# EAGLE board SparkFun_OpenScale_Panel_v10 (EAGLE 7.5.0), part 1 of 6
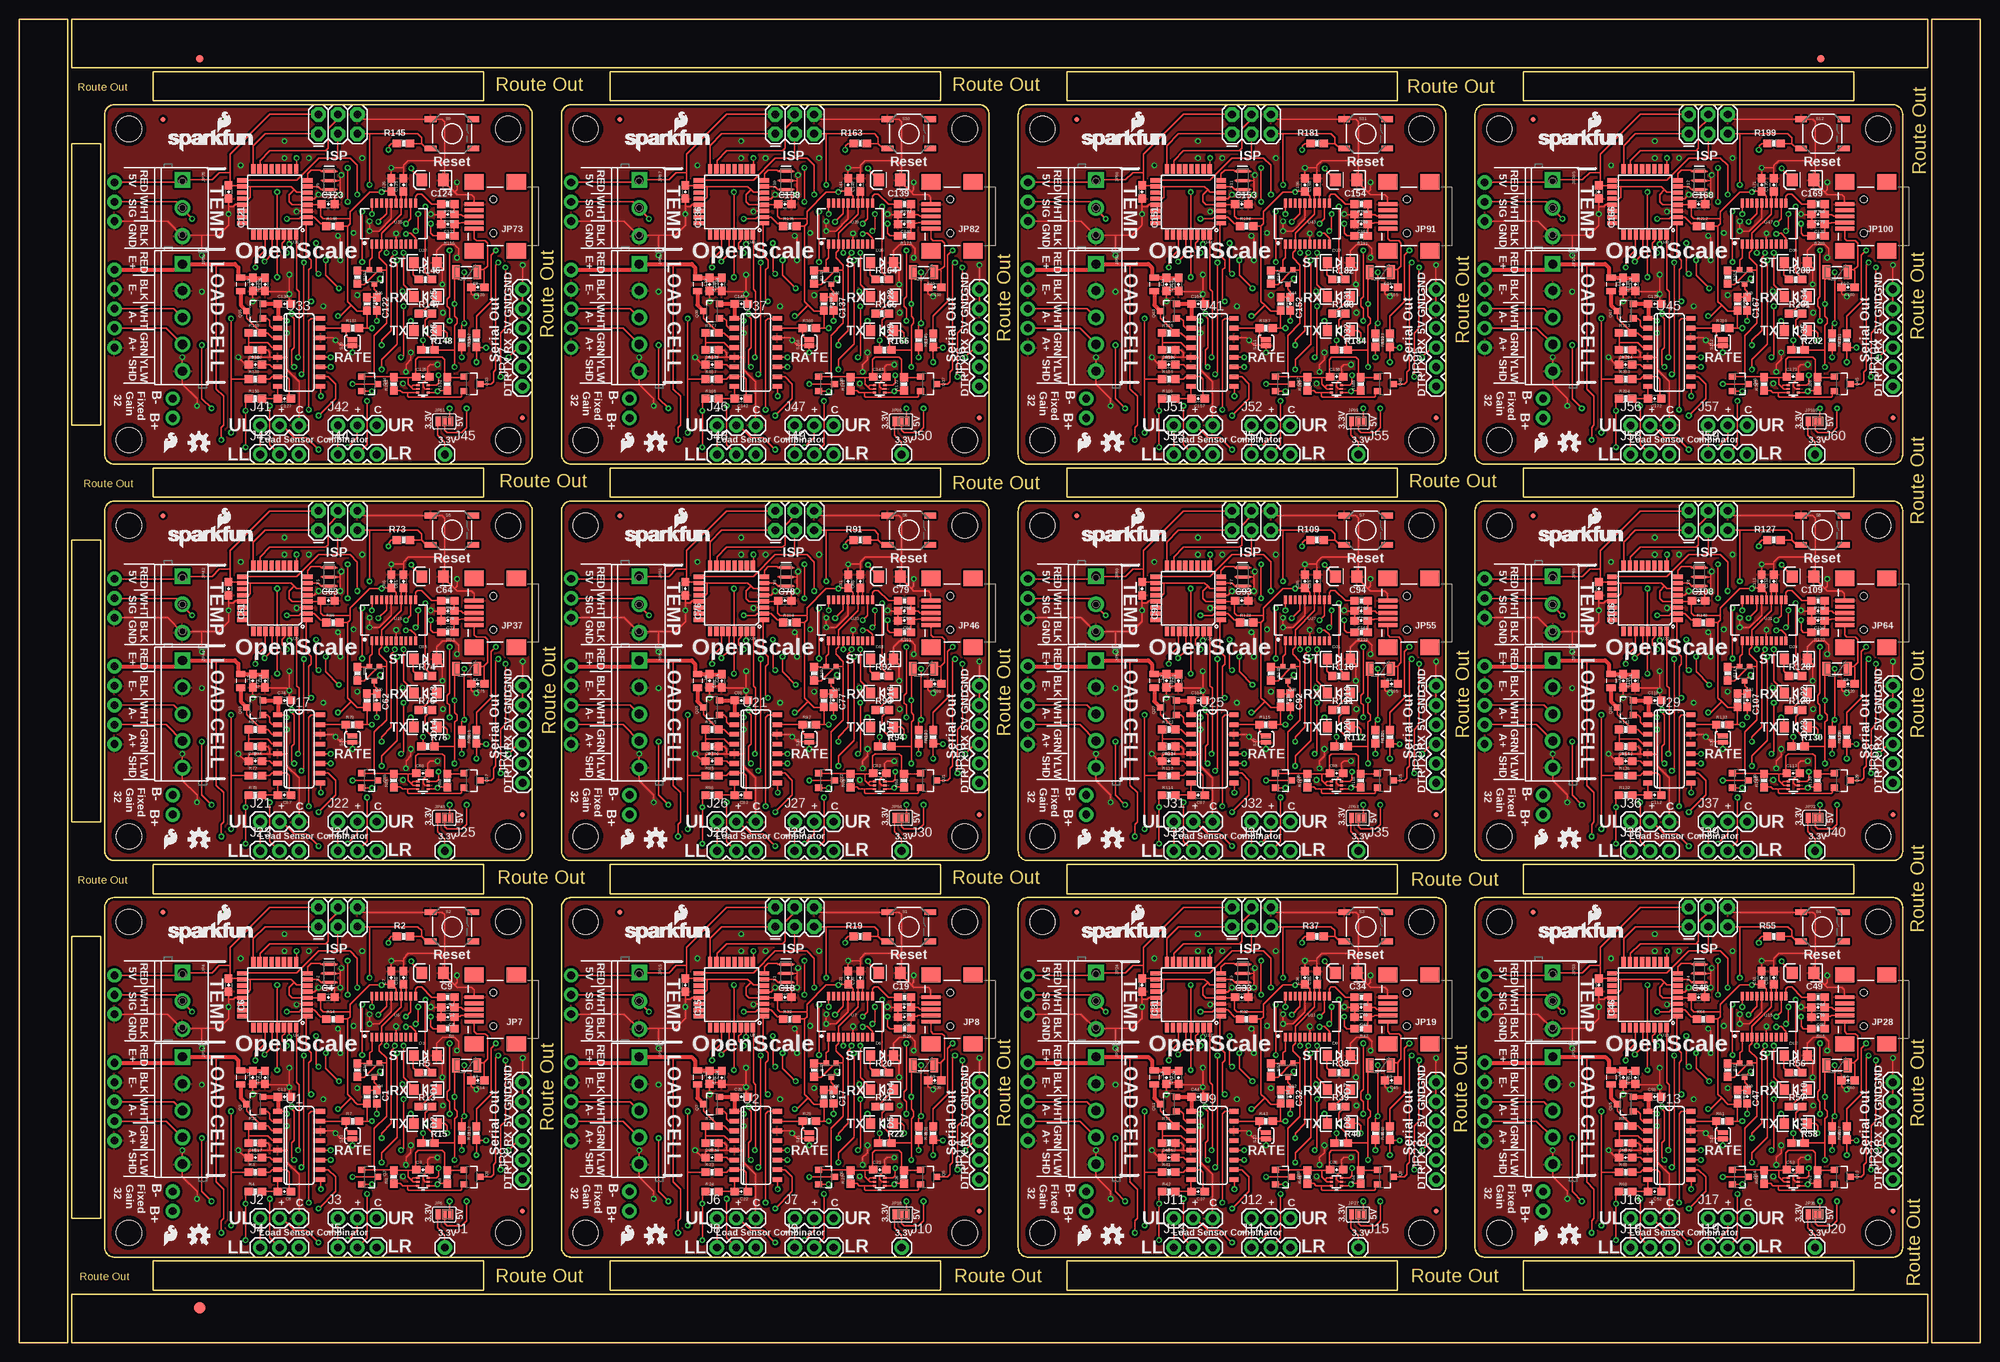
[diagram p0: board, top side]
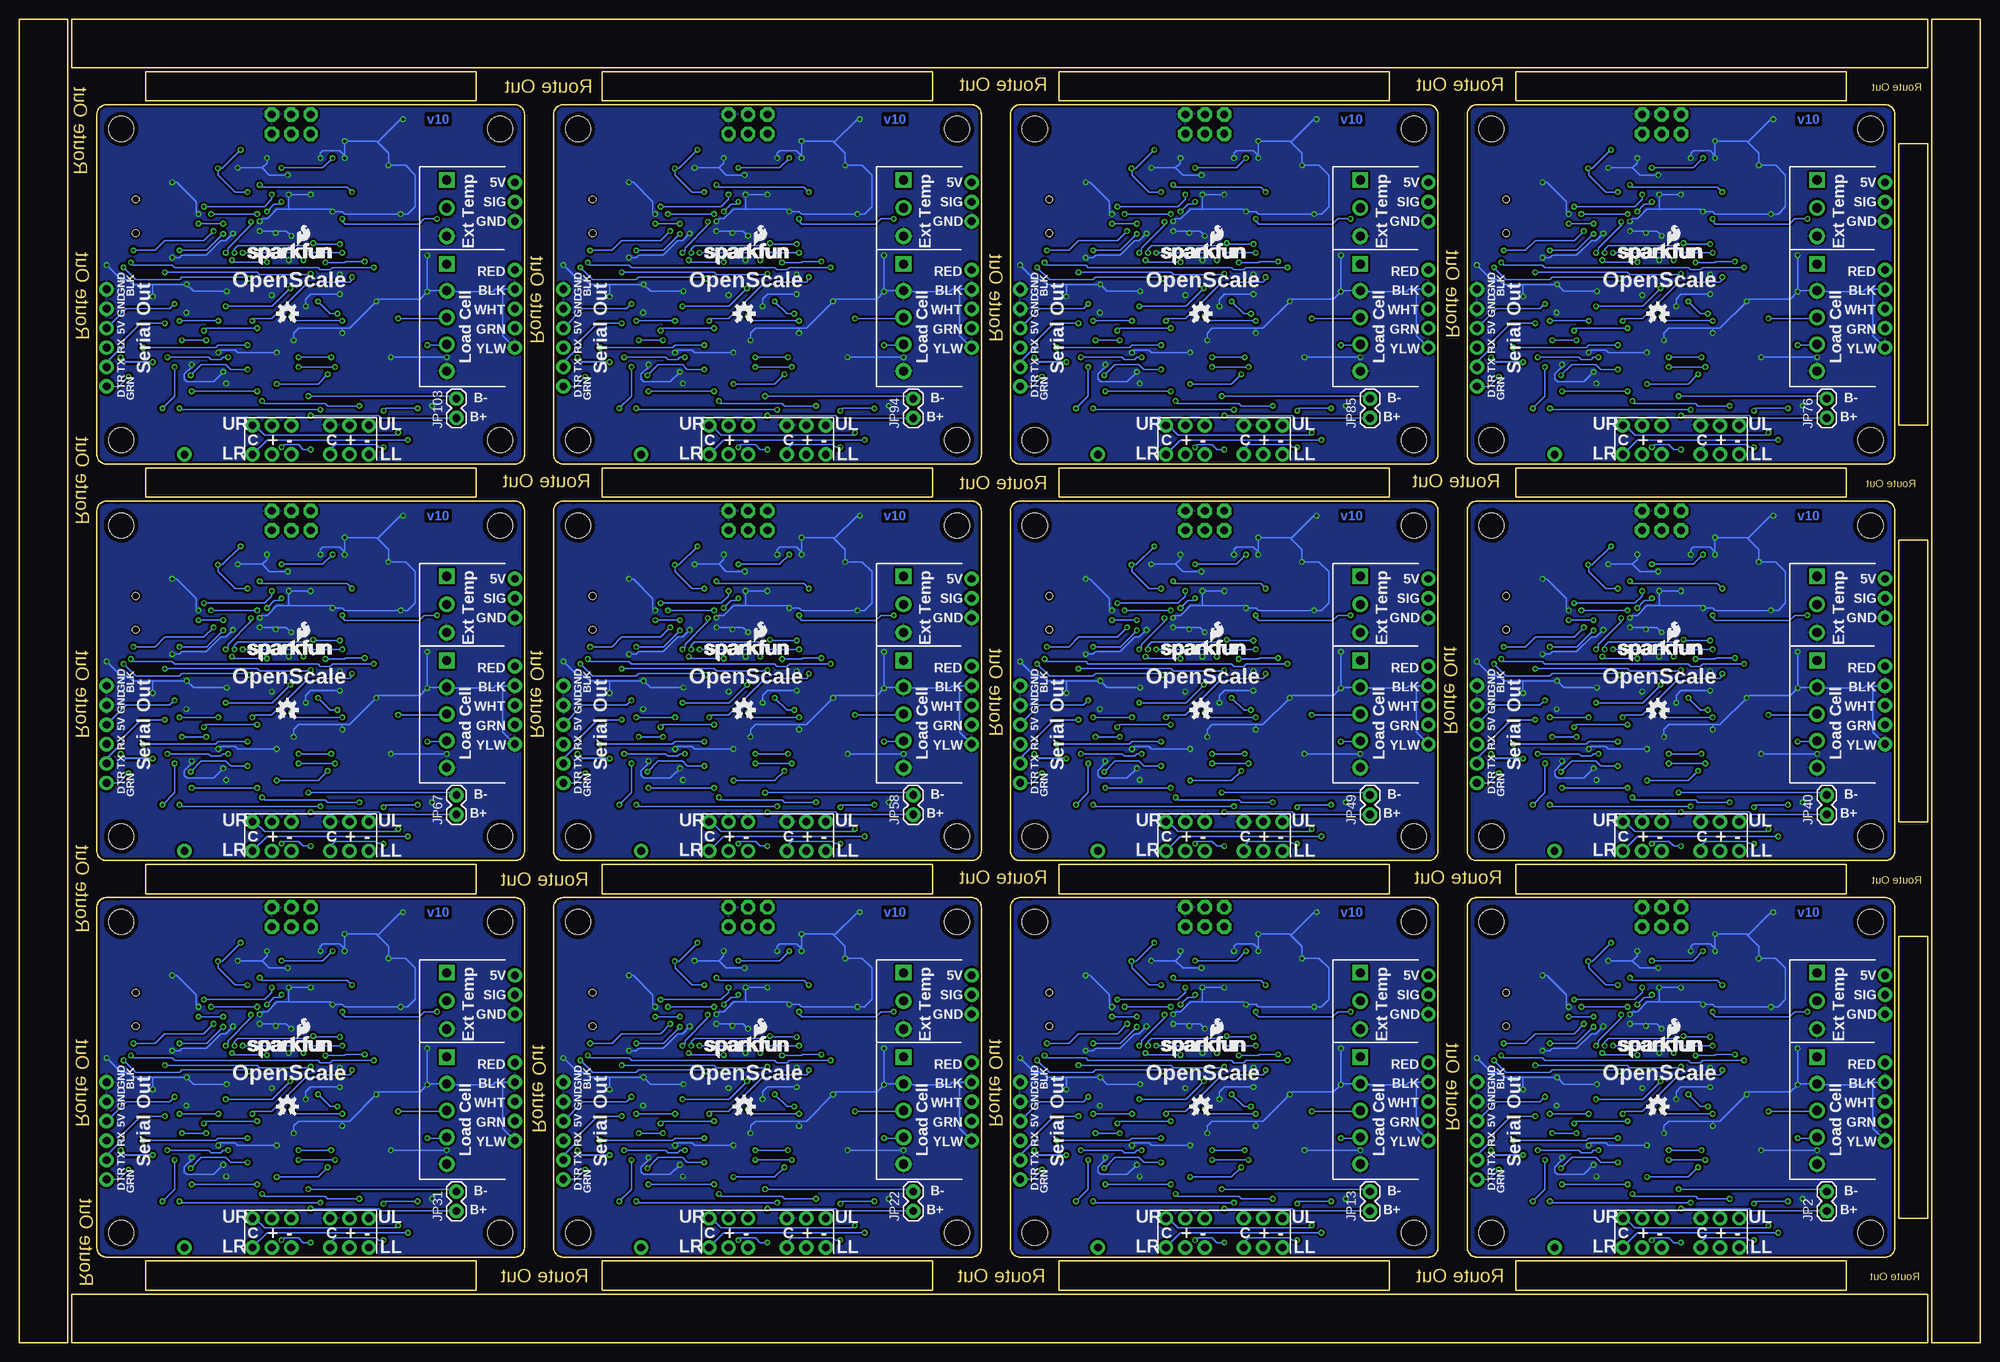
[diagram p1: board, bottom side, seen from below]

Size 256.29 x 172.97 mm. Coordinates in mm from the lower left corner, seen from the top.
Outline: 208 segments
Copper layers (1*16): Top 0.035mm / dielectric 1.5mm / Bottom 0.035mm
Design rules "SparkFun-2-layer-TIGHT": minimum track width 7mil, minimum drill 15mil, track to track 7mil, track to pad 7mil, pad to pad 7mil, via to via 7mil, smd to smd 7mil, copper to edge 7mil, drill to drill 7mil, minimum pad ring 7mil, minimum via ring 7mil, stop-mask expansion 4mil, vias tented up to drill 25mil, thermal gap 10mil
Net classes: 1 power: width 0.203 mm

## Footprints (pad centres in the part's own frame; a part is rotated, then mirrored left to right if it is on the bottom)
0603-CAP = smd 1.1 x 1: 1 -0.85,0; 2 0.85,0
EIA3216 = smd 1.4 x 1.6: A 1.4,0; C -1.4,0
LED-1206 = smd 1.2 x 1.4: A -1.5,0; C 1.5,0
FIDUCIAL-1.5X3 = smd 1.5 x 1.5: 1 0,0
FIDUCIAL-1X2 = smd 1 x 1: 1 0,0
PTC-1206 = smd 1 x 1.8: 1 -1.4,0; 2 1.4,0
MICRO-FIDUCIAL = smd 0.635 x 0.635: 1 0,0
1X01 = drill 1.016 pad 1.88: 1 0,0
1X03 = drill 1.016 pad 1.88: 1 0,0; 2 2.54,0; 3 5.08,0
1X03_NO_SILK = drill 1.016 pad 1.88: 1 0,0; 2 2.54,0; 3 5.08,0
1X02 = drill 1.016 pad 1.88: 1 0,0; 2 2.54,0
1X05_NO_SILK = drill 1.016 pad 1.88: 1 0,0; 2 2.54,0; 3 5.08,0; 4 7.62,0; 5 10.16,0
SCREWTERMINAL-3.5MM-3_LOCK.007S = drill 1.2 pad 2.032 square: 1 -0.178,0 | drill 1.2 pad 2.032: 2 3.5,0; 3 7.178,0
2X3 = drill 1.016 pad 1.88 octagon: 1 0,0; 2 0,2.54; 3 2.54,0; 4 2.54,2.54; 5 5.08,0; 6 5.08,2.54
PAD-JUMPER-3-2OF3_NC_BY_PASTE_YES_SILK_FULL_BOX = smd 0.635 x 1.27: 1 -0.813,0; 2 0,0; 3 0.813,0
USB-MINIB = smd 2.5 x 0.5: D+ 2.5,0; D- 2.5,0.8; GND 2.5,-1.6; ID 2.5,-0.8; VBUS 2.5,1.6 | smd 2.5 x 2: MTN1 -3,4.5; MTN2 2.5,4.5; MTN3 -3,-4.5; MTN4 2.5,-4.5 | hole 0.9: 0,2.2; 0,-2.2
FTDI_BASIC = drill 1.016 pad 1.88: CTS 10.16,0; DTR 0,0; GND 12.7,0; RXI 2.54,0; TXO 5.08,0; VCC 7.62,0
SCREWTERMINAL-3.5MM-5 = drill 1.2 pad 2.032 square: 1 0,0 | drill 1.2 pad 2.032: 2 3.5,0; 3 7,0; 4 10.5,0; 5 14,0
0805 = smd 0.8 x 1.2: 1 -0.9,0; 2 0.9,0
SOT23-3 = smd 0.8 x 0.9: 1 -0.95,-1; 2 0.95,-1; 3 0,1.1
SOT323 = smd 0.7 x 0.7: 1 -0.65,-0.925; 2 0.65,-0.925; 3 0,0.925
0603 = smd 1.1 x 1: 1 -0.85,0; 2 0.85,0
0603-RES = smd 1.1 x 1: 1 -0.85,0; 2 0.85,0
TACTILE-SWITCH-SMD = smd 1.524 x 0.762: 1 -2.794,1.905; 2 2.794,1.905; 3 -2.794,-1.905; 4 2.794,-1.905
PAD-JUMPER-2-NC_BY_PASTE_YES_SILK = smd 0.635 x 1.27: 1 -0.401,0; 2 0.413,0
STAND-OFF = hole 3.302: 0,0
SO16 = smd 0.6 x 1.2: 1 -4.445,-2.8; 2 -3.175,-2.8; 3 -1.905,-2.8; 4 -0.635,-2.8; 5 0.635,-2.8; 6 1.905,-2.8; 7 3.175,-2.8; 8 4.445,-2.8; 9 4.445,2.8; 10 3.175,2.8; 11 1.905,2.8; 12 0.635,2.8; 13 -0.635,2.8; 14 -1.905,2.8; 15 -3.175,2.8; 16 -4.445,2.8
SOT563 = smd 0.25 x 0.4: 1 -0.5,-0.66; 2 0,-0.66; 3 0.5,-0.66; 4 0.5,0.66; 5 0,0.66; 6 -0.5,0.67
TQFP32-08 = smd 1.27 x 0.559: 1 -4.293,2.8; 2 -4.293,2; 3 -4.293,1.2; 4 -4.293,0.4; 5 -4.293,-0.4; 6 -4.293,-1.2; 7 -4.293,-2; 8 -4.293,-2.8; 17 4.293,-2.8; 18 4.293,-2; 19 4.293,-1.2; 20 4.293,-0.4; 21 4.293,0.4; 22 4.293,1.2; 23 4.293,2; 24 4.293,2.8 | smd 0.559 x 1.27: 9 -2.8,-4.293; 10 -2,-4.293; 11 -1.2,-4.293; 12 -0.4,-4.293; 13 0.4,-4.293; 14 1.2,-4.293; 15 2,-4.293; 16 2.8,-4.293; 25 2.8,4.293; 26 2,4.293; 27 1.2,4.293; 28 0.4,4.293; 29 -0.4,4.293; 30 -1.2,4.293; 31 -2,4.293; 32 -2.8,4.293
SSOP20_L = smd 0.381 x 1.143: 1 -2.857,-2.68; 2 -2.223,-2.68; 3 -1.587,-2.68; 4 -0.953,-2.68; 5 -0.318,-2.68; 6 0.318,-2.68; 7 0.953,-2.68; 8 1.587,-2.68; 9 2.223,-2.68; 10 2.857,-2.68; 11 2.857,2.68; 12 2.223,2.68; 13 1.587,2.68; 14 0.953,2.68; 15 0.318,2.68; 16 -0.318,2.68; 17 -0.953,2.68; 18 -1.587,2.68; 19 -2.223,2.68; 20 -2.857,2.68
RESONATOR-SMD = smd 0.45 x 1.905: 1 -1.2,0; 2 0,0; 3 1.2,0

## Placement (x,y rotation side)
C1  0.1uF  [0603-CAP]  46.74,32.13 270 top
C2  47pF  [0603-CAP]  56.01,43.81 180 top
C3  0.1uF  [0603-CAP]  52.77,22.61 0 top
C4  1.0uF  [0603-CAP]  40.39,45.15 0 top
C5  47pF  [0603-CAP]  56.01,42.55 180 top
C6  0.1uF  [0603-CAP]  27.37,46.74 270 top
C7  0.1uF  [0603-CAP]  48.64,47.69 90 top
C8  0.1uF  [0603-CAP]  34.67,19.75 180 top
C9  10uF  [EIA3216]  54.04,48.32 180 top
C10  0.1uF  [0603-CAP]  50.23,47.69 90 top
C11  0.1uF  [0603-CAP]  30.86,24.19 0 top
C12  1.0uF  [0603-CAP]  32.13,34.67 90 top
C13  1.0uF  [0603-CAP]  34.67,32.13 0 top
C14  0.1uF  [0603-CAP]  59.94,34.29 180 top
C15  0.1uF  [0603-CAP]  87.06,46.74 270 top
C16  0.1uF  [0603-CAP]  30.54,34.67 270 top
C17  0.1uF  [0603-CAP]  106.43,32.13 270 top
C18  1.0uF  [0603-CAP]  100.08,45.15 0 top
C19  10uF  [EIA3216]  113.73,48.32 180 top
C20  0.1uF  [0603-CAP]  109.92,47.69 90 top
C21  0.1uF  [0603-CAP]  108.33,47.69 90 top
C22  0.1uF  [0603-CAP]  94.36,19.75 180 top
C23  0.1uF  [0603-CAP]  112.46,22.61 0 top
C24  0.1uF  [0603-CAP]  90.23,34.67 270 top
C25  47pF  [0603-CAP]  115.7,43.81 180 top
C26  47pF  [0603-CAP]  115.7,42.55 180 top
C27  0.1uF  [0603-CAP]  90.55,24.19 0 top
C28  1.0uF  [0603-CAP]  91.82,34.67 90 top
C29  1.0uF  [0603-CAP]  94.36,32.13 0 top
C30  0.1uF  [0603-CAP]  119.63,34.29 180 top
C31  0.1uF  [0603-CAP]  146.75,46.74 270 top
C32  0.1uF  [0603-CAP]  166.12,32.13 270 top
C33  1.0uF  [0603-CAP]  159.77,45.15 0 top
C34  10uF  [EIA3216]  173.42,48.32 180 top
C35  0.1uF  [0603-CAP]  169.61,47.69 90 top
C36  0.1uF  [0603-CAP]  168.02,47.69 90 top
C37  0.1uF  [0603-CAP]  154.05,19.75 180 top
C38  0.1uF  [0603-CAP]  172.15,22.61 0 top
C39  0.1uF  [0603-CAP]  149.92,34.67 270 top
C40  47pF  [0603-CAP]  175.39,43.81 180 top
C41  47pF  [0603-CAP]  175.39,42.55 180 top
C42  0.1uF  [0603-CAP]  150.24,24.19 0 top
C43  1.0uF  [0603-CAP]  151.51,34.67 90 top
C44  1.0uF  [0603-CAP]  154.05,32.13 0 top
C45  0.1uF  [0603-CAP]  179.32,34.29 180 top
C46  0.1uF  [0603-CAP]  206.44,46.74 270 top
C47  0.1uF  [0603-CAP]  225.81,32.13 270 top
C48  1.0uF  [0603-CAP]  219.46,45.15 0 top
C49  10uF  [EIA3216]  233.11,48.32 180 top
C50  0.1uF  [0603-CAP]  229.3,47.69 90 top
C51  0.1uF  [0603-CAP]  227.71,47.69 90 top
C52  0.1uF  [0603-CAP]  213.74,19.75 180 top
C53  0.1uF  [0603-CAP]  231.84,22.61 0 top
C54  0.1uF  [0603-CAP]  209.61,34.67 270 top
C55  47pF  [0603-CAP]  235.08,43.81 180 top
C56  47pF  [0603-CAP]  235.08,42.55 180 top
C57  0.1uF  [0603-CAP]  209.93,24.19 0 top
C58  1.0uF  [0603-CAP]  211.2,34.67 90 top
C59  1.0uF  [0603-CAP]  213.74,32.13 0 top
C60  0.1uF  [0603-CAP]  239.01,34.29 180 top
C61  0.1uF  [0603-CAP]  27.37,98.55 270 top
C62  0.1uF  [0603-CAP]  46.74,83.95 270 top
C63  1.0uF  [0603-CAP]  40.39,96.96 0 top
C64  10uF  [EIA3216]  54.04,100.14 180 top
C65  0.1uF  [0603-CAP]  50.23,99.5 90 top
C66  0.1uF  [0603-CAP]  48.64,99.5 90 top
C67  0.1uF  [0603-CAP]  34.67,71.56 180 top
C68  0.1uF  [0603-CAP]  52.77,74.42 0 top
C69  0.1uF  [0603-CAP]  30.54,86.49 270 top
C70  47pF  [0603-CAP]  56.01,95.63 180 top
C71  47pF  [0603-CAP]  56.01,94.36 180 top
C72  0.1uF  [0603-CAP]  30.86,76.01 0 top
C73  1.0uF  [0603-CAP]  32.13,86.49 90 top
C74  1.0uF  [0603-CAP]  34.67,83.95 0 top
C75  0.1uF  [0603-CAP]  59.94,86.11 180 top
C76  0.1uF  [0603-CAP]  87.06,98.55 270 top
C77  0.1uF  [0603-CAP]  106.43,83.95 270 top
C78  1.0uF  [0603-CAP]  100.08,96.96 0 top
C79  10uF  [EIA3216]  113.73,100.14 180 top
C80  0.1uF  [0603-CAP]  109.92,99.5 90 top
C81  0.1uF  [0603-CAP]  108.33,99.5 90 top
C82  0.1uF  [0603-CAP]  94.36,71.56 180 top
C83  0.1uF  [0603-CAP]  112.46,74.42 0 top
C84  0.1uF  [0603-CAP]  90.23,86.49 270 top
C85  47pF  [0603-CAP]  115.7,95.63 180 top
C86  47pF  [0603-CAP]  115.7,94.36 180 top
C87  0.1uF  [0603-CAP]  90.55,76.01 0 top
C88  1.0uF  [0603-CAP]  91.82,86.49 90 top
C89  1.0uF  [0603-CAP]  94.36,83.95 0 top
C90  0.1uF  [0603-CAP]  119.63,86.11 180 top
C91  0.1uF  [0603-CAP]  146.75,98.55 270 top
C92  0.1uF  [0603-CAP]  166.12,83.95 270 top
C93  1.0uF  [0603-CAP]  159.77,96.96 0 top
C94  10uF  [EIA3216]  173.42,100.14 180 top
C95  0.1uF  [0603-CAP]  169.61,99.5 90 top
C96  0.1uF  [0603-CAP]  168.02,99.5 90 top
C97  0.1uF  [0603-CAP]  154.05,71.56 180 top
C98  0.1uF  [0603-CAP]  172.15,74.42 0 top
C99  0.1uF  [0603-CAP]  149.92,86.49 270 top
C100  47pF  [0603-CAP]  175.39,95.63 180 top
C101  47pF  [0603-CAP]  175.39,94.36 180 top
C102  0.1uF  [0603-CAP]  150.24,76.01 0 top
C103  1.0uF  [0603-CAP]  151.51,86.49 90 top
C104  1.0uF  [0603-CAP]  154.05,83.95 0 top
C105  0.1uF  [0603-CAP]  179.32,86.11 180 top
C106  0.1uF  [0603-CAP]  206.44,98.55 270 top
C107  0.1uF  [0603-CAP]  225.81,83.95 270 top
C108  1.0uF  [0603-CAP]  219.46,96.96 0 top
C109  10uF  [EIA3216]  233.11,100.14 180 top
C110  0.1uF  [0603-CAP]  229.3,99.5 90 top
C111  0.1uF  [0603-CAP]  227.71,99.5 90 top
C112  0.1uF  [0603-CAP]  213.74,71.56 180 top
C113  0.1uF  [0603-CAP]  231.84,74.42 0 top
C114  0.1uF  [0603-CAP]  209.61,86.49 270 top
C115  47pF  [0603-CAP]  235.08,95.63 180 top
C116  47pF  [0603-CAP]  235.08,94.36 180 top
C117  0.1uF  [0603-CAP]  209.93,76.01 0 top
C118  1.0uF  [0603-CAP]  211.2,86.49 90 top
C119  1.0uF  [0603-CAP]  213.74,83.95 0 top
C120  0.1uF  [0603-CAP]  239.01,86.11 180 top
C121  0.1uF  [0603-CAP]  27.37,150.37 270 top
C122  0.1uF  [0603-CAP]  46.74,135.76 270 top
C123  1.0uF  [0603-CAP]  40.39,148.78 0 top
C124  10uF  [EIA3216]  54.04,151.96 180 top
C125  0.1uF  [0603-CAP]  50.23,151.32 90 top
C126  0.1uF  [0603-CAP]  48.64,151.32 90 top
C127  0.1uF  [0603-CAP]  34.67,123.38 180 top
C128  0.1uF  [0603-CAP]  52.77,126.24 0 top
C129  0.1uF  [0603-CAP]  30.54,138.3 270 top
C130  47pF  [0603-CAP]  56.01,147.45 180 top
C131  47pF  [0603-CAP]  56.01,146.18 180 top
C132  0.1uF  [0603-CAP]  30.86,127.83 0 top
C133  1.0uF  [0603-CAP]  32.13,138.3 90 top
C134  1.0uF  [0603-CAP]  34.67,135.76 0 top
C135  0.1uF  [0603-CAP]  59.94,137.92 180 top
C136  0.1uF  [0603-CAP]  87.06,150.37 270 top
C137  0.1uF  [0603-CAP]  106.43,135.76 270 top
C138  1.0uF  [0603-CAP]  100.08,148.78 0 top
C139  10uF  [EIA3216]  113.73,151.96 180 top
C140  0.1uF  [0603-CAP]  109.92,151.32 90 top
C141  0.1uF  [0603-CAP]  108.33,151.32 90 top
C142  0.1uF  [0603-CAP]  94.36,123.38 180 top
C143  0.1uF  [0603-CAP]  112.46,126.24 0 top
C144  0.1uF  [0603-CAP]  90.23,138.3 270 top
C145  47pF  [0603-CAP]  115.7,147.45 180 top
C146  47pF  [0603-CAP]  115.7,146.18 180 top
C147  0.1uF  [0603-CAP]  90.55,127.83 0 top
C148  1.0uF  [0603-CAP]  91.82,138.3 90 top
C149  1.0uF  [0603-CAP]  94.36,135.76 0 top
C150  0.1uF  [0603-CAP]  119.63,137.92 180 top
C151  0.1uF  [0603-CAP]  146.75,150.37 270 top
C152  0.1uF  [0603-CAP]  166.12,135.76 270 top
C153  1.0uF  [0603-CAP]  159.77,148.78 0 top
C154  10uF  [EIA3216]  173.42,151.96 180 top
C155  0.1uF  [0603-CAP]  169.61,151.32 90 top
C156  0.1uF  [0603-CAP]  168.02,151.32 90 top
C157  0.1uF  [0603-CAP]  154.05,123.38 180 top
C158  0.1uF  [0603-CAP]  172.15,126.24 0 top
C159  0.1uF  [0603-CAP]  149.92,138.3 270 top
C160  47pF  [0603-CAP]  175.39,147.45 180 top
C161  47pF  [0603-CAP]  175.39,146.18 180 top
C162  0.1uF  [0603-CAP]  150.24,127.83 0 top
C163  1.0uF  [0603-CAP]  151.51,138.3 90 top
C164  1.0uF  [0603-CAP]  154.05,135.76 0 top
C165  0.1uF  [0603-CAP]  179.32,137.92 180 top
C166  0.1uF  [0603-CAP]  206.44,150.37 270 top
C167  0.1uF  [0603-CAP]  225.81,135.76 270 top
C168  1.0uF  [0603-CAP]  219.46,148.78 0 top
C169  10uF  [EIA3216]  233.11,151.96 180 top
C170  0.1uF  [0603-CAP]  229.3,151.32 90 top
C171  0.1uF  [0603-CAP]  227.71,151.32 90 top
C172  0.1uF  [0603-CAP]  213.74,123.38 180 top
C173  0.1uF  [0603-CAP]  231.84,126.24 0 top
C174  0.1uF  [0603-CAP]  209.61,138.3 270 top
C175  47pF  [0603-CAP]  235.08,147.45 180 top
C176  47pF  [0603-CAP]  235.08,146.18 180 top
C177  0.1uF  [0603-CAP]  209.93,127.83 0 top
C178  1.0uF  [0603-CAP]  211.2,138.3 90 top
C179  1.0uF  [0603-CAP]  213.74,135.76 0 top
C180  0.1uF  [0603-CAP]  239.01,137.92 180 top
D1  Yellow  [LED-1206]  53.09,33.08 180 top
D2  GREEN  [LED-1206]  53.09,28.64 180 top
D3  BLUE  [LED-1206]  53.09,37.53 0 top
D4  Yellow  [LED-1206]  112.78,33.08 180 top
D5  GREEN  [LED-1206]  112.78,28.64 180 top
D6  BLUE  [LED-1206]  112.78,37.53 0 top
D7  Yellow  [LED-1206]  172.47,33.08 180 top
D8  GREEN  [LED-1206]  172.47,28.64 180 top
D9  BLUE  [LED-1206]  172.47,37.53 0 top
D10  Yellow  [LED-1206]  232.16,33.08 180 top
D11  GREEN  [LED-1206]  232.16,28.64 180 top
D12  BLUE  [LED-1206]  232.16,37.53 0 top
D13  Yellow  [LED-1206]  53.09,84.9 180 top
D14  GREEN  [LED-1206]  53.09,80.45 180 top
D15  BLUE  [LED-1206]  53.09,89.34 0 top
D16  Yellow  [LED-1206]  112.78,84.9 180 top
D17  GREEN  [LED-1206]  112.78,80.45 180 top
D18  BLUE  [LED-1206]  112.78,89.34 0 top
D19  Yellow  [LED-1206]  172.47,84.9 180 top
D20  GREEN  [LED-1206]  172.47,80.45 180 top
D21  BLUE  [LED-1206]  172.47,89.34 0 top
D22  Yellow  [LED-1206]  232.16,84.9 180 top
D23  GREEN  [LED-1206]  232.16,80.45 180 top
D24  BLUE  [LED-1206]  232.16,89.34 0 top
D25  Yellow  [LED-1206]  53.09,136.72 180 top
D26  GREEN  [LED-1206]  53.09,132.27 180 top
D27  BLUE  [LED-1206]  53.09,141.16 0 top
D28  Yellow  [LED-1206]  112.78,136.72 180 top
D29  GREEN  [LED-1206]  112.78,132.27 180 top
D30  BLUE  [LED-1206]  112.78,141.16 0 top
D31  Yellow  [LED-1206]  172.47,136.72 180 top
D32  GREEN  [LED-1206]  172.47,132.27 180 top
D33  BLUE  [LED-1206]  172.47,141.16 0 top
D34  Yellow  [LED-1206]  232.16,136.72 180 top
D35  GREEN  [LED-1206]  232.16,132.27 180 top
D36  BLUE  [LED-1206]  232.16,141.16 0 top
E$1  [FIDUCIAL-1.5X3]  23.62,4.57 0 top
E$7  [FIDUCIAL-1X2]  235.46,167.77 90 top
E$8  [FIDUCIAL-1X2]  23.62,167.77 270 top
F1  PTCSMD  [PTC-1206]  58.48,36.26 180 top
F2  PTCSMD  [PTC-1206]  118.17,36.26 180 top
F3  PTCSMD  [PTC-1206]  177.86,36.26 180 top
F4  PTCSMD  [PTC-1206]  237.55,36.26 180 top
F5  PTCSMD  [PTC-1206]  58.48,88.07 180 top
F6  PTCSMD  [PTC-1206]  118.17,88.07 180 top
F7  PTCSMD  [PTC-1206]  177.86,88.07 180 top
F8  PTCSMD  [PTC-1206]  237.55,88.07 180 top
F9  PTCSMD  [PTC-1206]  58.48,139.89 180 top
F10  PTCSMD  [PTC-1206]  118.17,139.89 180 top
F11  PTCSMD  [PTC-1206]  177.86,139.89 180 top
F12  PTCSMD  [PTC-1206]  237.55,139.89 180 top
FID1  FIDUCIALUFIDUCIAL  [MICRO-FIDUCIAL]  65.79,17.21 0 top
FID2  FIDUCIALUFIDUCIAL  [MICRO-FIDUCIAL]  18.8,56.26 0 top
FID3  FIDUCIALUFIDUCIAL  [MICRO-FIDUCIAL]  125.48,17.21 0 top
FID4  FIDUCIALUFIDUCIAL  [MICRO-FIDUCIAL]  78.49,56.26 0 top
FID5  FIDUCIALUFIDUCIAL  [MICRO-FIDUCIAL]  185.17,17.21 0 top
FID6  FIDUCIALUFIDUCIAL  [MICRO-FIDUCIAL]  138.18,56.26 0 top
FID7  FIDUCIALUFIDUCIAL  [MICRO-FIDUCIAL]  244.86,17.21 0 top
FID8  FIDUCIALUFIDUCIAL  [MICRO-FIDUCIAL]  197.87,56.26 0 top
FID9  FIDUCIALUFIDUCIAL  [MICRO-FIDUCIAL]  65.79,69.02 0 top
FID10  FIDUCIALUFIDUCIAL  [MICRO-FIDUCIAL]  18.8,108.08 0 top
FID11  FIDUCIALUFIDUCIAL  [MICRO-FIDUCIAL]  125.48,69.02 0 top
FID12  FIDUCIALUFIDUCIAL  [MICRO-FIDUCIAL]  78.49,108.08 0 top
FID13  FIDUCIALUFIDUCIAL  [MICRO-FIDUCIAL]  185.17,69.02 0 top
FID14  FIDUCIALUFIDUCIAL  [MICRO-FIDUCIAL]  138.18,108.08 0 top
FID15  FIDUCIALUFIDUCIAL  [MICRO-FIDUCIAL]  244.86,69.02 0 top
FID16  FIDUCIALUFIDUCIAL  [MICRO-FIDUCIAL]  197.87,108.08 0 top
FID17  FIDUCIALUFIDUCIAL  [MICRO-FIDUCIAL]  65.79,120.84 0 top
FID18  FIDUCIALUFIDUCIAL  [MICRO-FIDUCIAL]  18.8,159.89 0 top
FID19  FIDUCIALUFIDUCIAL  [MICRO-FIDUCIAL]  125.48,120.84 0 top
FID20  FIDUCIALUFIDUCIAL  [MICRO-FIDUCIAL]  78.49,159.89 0 top
FID21  FIDUCIALUFIDUCIAL  [MICRO-FIDUCIAL]  185.17,120.84 0 top
FID22  FIDUCIALUFIDUCIAL  [MICRO-FIDUCIAL]  138.18,159.89 0 top
FID23  FIDUCIALUFIDUCIAL  [MICRO-FIDUCIAL]  244.86,120.84 0 top
FID24  FIDUCIALUFIDUCIAL  [MICRO-FIDUCIAL]  197.87,159.89 0 top
J1  3.3V  [1X01]  55.63,12.45 0 top
J2  UL  [1X03]  31.5,16.26 0 top
J3  UR  [1X03]  41.66,16.26 0 top
J4  LL  [1X03]  31.5,12.45 0 top
J5  LR  [1X03]  41.66,12.45 0 top
J6  UL  [1X03]  91.19,16.26 0 top
J7  UR  [1X03]  101.35,16.26 0 top
J8  LL  [1X03]  91.19,12.45 0 top
J9  LR  [1X03]  101.35,12.45 0 top
J10  3.3V  [1X01]  115.32,12.45 0 top
J11  UL  [1X03]  150.88,16.26 0 top
J12  UR  [1X03]  161.04,16.26 0 top
J13  LL  [1X03]  150.88,12.45 0 top
J14  LR  [1X03]  161.04,12.45 0 top
J15  3.3V  [1X01]  175.01,12.45 0 top
J16  UL  [1X03]  210.57,16.26 0 top
J17  UR  [1X03]  220.73,16.26 0 top
J18  LL  [1X03]  210.57,12.45 0 top
J19  LR  [1X03]  220.73,12.45 0 top
J20  3.3V  [1X01]  234.7,12.45 0 top
J21  UL  [1X03]  31.5,68.07 0 top
J22  UR  [1X03]  41.66,68.07 0 top
J23  LL  [1X03]  31.5,64.26 0 top
J24  LR  [1X03]  41.66,64.26 0 top
J25  3.3V  [1X01]  55.63,64.26 0 top
J26  UL  [1X03]  91.19,68.07 0 top
J27  UR  [1X03]  101.35,68.07 0 top
J28  LL  [1X03]  91.19,64.26 0 top
J29  LR  [1X03]  101.35,64.26 0 top
J30  3.3V  [1X01]  115.32,64.26 0 top
J31  UL  [1X03]  150.88,68.07 0 top
J32  UR  [1X03]  161.04,68.07 0 top
J33  LL  [1X03]  150.88,64.26 0 top
J34  LR  [1X03]  161.04,64.26 0 top
J35  3.3V  [1X01]  175.01,64.26 0 top
J36  UL  [1X03]  210.57,68.07 0 top
J37  UR  [1X03]  220.73,68.07 0 top
J38  LL  [1X03]  210.57,64.26 0 top
J39  LR  [1X03]  220.73,64.26 0 top
J40  3.3V  [1X01]  234.7,64.26 0 top
J41  UL  [1X03]  31.5,119.89 0 top
J42  UR  [1X03]  41.66,119.89 0 top
J43  LL  [1X03]  31.5,116.08 0 top
J44  LR  [1X03]  41.66,116.08 0 top
J45  3.3V  [1X01]  55.63,116.08 0 top
J46  UL  [1X03]  91.19,119.89 0 top
J47  UR  [1X03]  101.35,119.89 0 top
J48  LL  [1X03]  91.19,116.08 0 top
J49  LR  [1X03]  101.35,116.08 0 top
J50  3.3V  [1X01]  115.32,116.08 0 top
J51  UL  [1X03]  150.88,119.89 0 top
J52  UR  [1X03]  161.04,119.89 0 top
J53  LL  [1X03]  150.88,116.08 0 top
J54  LR  [1X03]  161.04,116.08 0 top
J55  3.3V  [1X01]  175.01,116.08 0 top
J56  UL  [1X03]  210.57,119.89 0 top
J57  UR  [1X03]  220.73,119.89 0 top
J58  LL  [1X03]  210.57,116.08 0 top
J59  LR  [1X03]  220.73,116.08 0 top
J60  3.3V  [1X01]  234.7,116.08 0 top
JP1  Temp  [1X03_NO_SILK]  12.45,48.01 270 bottom
JP2  Fixed Gain 32  [1X02]  20.07,17.21 90 bottom
JP3  Load  [1X05_NO_SILK]  12.45,26.42 90 top
JP4  Screw  [SCREWTERMINAL-3.5MM-3_LOCK.007S]  21.34,48.16 270 top
JP5  AVR_PRG  [2X3]  39.12,54.36 0 top
JP6  JUMPER-PAD-3-2OF3_NC_BY_PASTE  [PAD-JUMPER-3-2OF3_NC_BY_PASTE_YES_SILK_FULL_BOX]  55.56,16.76 0 top
JP7  USBSMD  [USB-MINIB]  61.98,43.56 180 top
JP8  USBSMD  [USB-MINIB]  121.67,43.56 180 top
JP9  FTDI_BASIC  [FTDI_BASIC]  65.79,21.34 90 top
JP10  AVR_PRG  [2X3]  98.81,54.36 0 top
JP11  Screw Terminals  [SCREWTERMINAL-3.5MM-5]  21.34,37.34 270 top
JP12  Temp  [1X03_NO_SILK]  72.14,48.01 270 bottom
JP13  Fixed Gain 32  [1X02]  79.76,17.21 90 bottom
JP14  FTDI_BASIC  [FTDI_BASIC]  125.48,21.34 90 top
JP15  Screw  [SCREWTERMINAL-3.5MM-3_LOCK.007S]  81.03,48.16 270 top
JP16  Load  [1X05_NO_SILK]  72.14,26.42 90 top
JP17  Screw Terminals  [SCREWTERMINAL-3.5MM-5]  81.03,37.34 270 top
JP18  JUMPER-PAD-3-2OF3_NC_BY_PASTE  [PAD-JUMPER-3-2OF3_NC_BY_PASTE_YES_SILK_FULL_BOX]  115.25,16.76 0 top
JP19  USBSMD  [USB-MINIB]  181.36,43.56 180 top
JP20  AVR_PRG  [2X3]  158.5,54.36 0 top
JP21  Temp  [1X03_NO_SILK]  131.83,48.01 270 bottom
JP22  Fixed Gain 32  [1X02]  139.45,17.21 90 bottom
JP23  FTDI_BASIC  [FTDI_BASIC]  185.17,21.34 90 top
JP24  Screw  [SCREWTERMINAL-3.5MM-3_LOCK.007S]  140.72,48.16 270 top
JP25  Load  [1X05_NO_SILK]  131.83,26.42 90 top
JP26  Screw Terminals  [SCREWTERMINAL-3.5MM-5]  140.72,37.34 270 top
JP27  JUMPER-PAD-3-2OF3_NC_BY_PASTE  [PAD-JUMPER-3-2OF3_NC_BY_PASTE_YES_SILK_FULL_BOX]  174.94,16.76 0 top
JP28  USBSMD  [USB-MINIB]  241.05,43.56 180 top
JP29  AVR_PRG  [2X3]  218.19,54.36 0 top
JP30  Temp  [1X03_NO_SILK]  191.52,48.01 270 bottom
JP31  Fixed Gain 32  [1X02]  199.14,17.21 90 bottom
JP32  FTDI_BASIC  [FTDI_BASIC]  244.86,21.34 90 top
JP33  Screw  [SCREWTERMINAL-3.5MM-3_LOCK.007S]  200.41,48.16 270 top
JP34  Load  [1X05_NO_SILK]  191.52,26.42 90 top
JP35  Screw Terminals  [SCREWTERMINAL-3.5MM-5]  200.41,37.34 270 top
JP36  JUMPER-PAD-3-2OF3_NC_BY_PASTE  [PAD-JUMPER-3-2OF3_NC_BY_PASTE_YES_SILK_FULL_BOX]  234.63,16.76 0 top
JP37  USBSMD  [USB-MINIB]  61.98,95.38 180 top
JP38  AVR_PRG  [2X3]  39.12,106.17 0 top
JP39  Temp  [1X03_NO_SILK]  12.45,99.82 270 bottom
JP40  Fixed Gain 32  [1X02]  20.07,69.02 90 bottom
JP41  FTDI_BASIC  [FTDI_BASIC]  65.79,73.15 90 top
JP42  Screw  [SCREWTERMINAL-3.5MM-3_LOCK.007S]  21.34,99.97 270 top
JP43  Load  [1X05_NO_SILK]  12.45,78.23 90 top
JP44  Screw Terminals  [SCREWTERMINAL-3.5MM-5]  21.34,89.15 270 top
JP45  JUMPER-PAD-3-2OF3_NC_BY_PASTE  [PAD-JUMPER-3-2OF3_NC_BY_PASTE_YES_SILK_FULL_BOX]  55.56,68.58 0 top
JP46  USBSMD  [USB-MINIB]  121.67,95.38 180 top
JP47  AVR_PRG  [2X3]  98.81,106.17 0 top
JP48  Temp  [1X03_NO_SILK]  72.14,99.82 270 bottom
JP49  Fixed Gain 32  [1X02]  79.76,69.02 90 bottom
JP50  FTDI_BASIC  [FTDI_BASIC]  125.48,73.15 90 top
JP51  Screw  [SCREWTERMINAL-3.5MM-3_LOCK.007S]  81.03,99.97 270 top
JP52  Load  [1X05_NO_SILK]  72.14,78.23 90 top
JP53  Screw Terminals  [SCREWTERMINAL-3.5MM-5]  81.03,89.15 270 top
JP54  JUMPER-PAD-3-2OF3_NC_BY_PASTE  [PAD-JUMPER-3-2OF3_NC_BY_PASTE_YES_SILK_FULL_BOX]  115.25,68.58 0 top
JP55  USBSMD  [USB-MINIB]  181.36,95.38 180 top
JP56  AVR_PRG  [2X3]  158.5,106.17 0 top
JP57  Temp  [1X03_NO_SILK]  131.83,99.82 270 bottom
JP58  Fixed Gain 32  [1X02]  139.45,69.02 90 bottom
JP59  FTDI_BASIC  [FTDI_BASIC]  185.17,73.15 90 top
JP60  Screw  [SCREWTERMINAL-3.5MM-3_LOCK.007S]  140.72,99.97 270 top
JP61  Load  [1X05_NO_SILK]  131.83,78.23 90 top
JP62  Screw Terminals  [SCREWTERMINAL-3.5MM-5]  140.72,89.15 270 top
JP63  JUMPER-PAD-3-2OF3_NC_BY_PASTE  [PAD-JUMPER-3-2OF3_NC_BY_PASTE_YES_SILK_FULL_BOX]  174.94,68.58 0 top
JP64  USBSMD  [USB-MINIB]  241.05,95.38 180 top
JP65  AVR_PRG  [2X3]  218.19,106.17 0 top
JP66  Temp  [1X03_NO_SILK]  191.52,99.82 270 bottom
JP67  Fixed Gain 32  [1X02]  199.14,69.02 90 bottom
JP68  FTDI_BASIC  [FTDI_BASIC]  244.86,73.15 90 top
JP69  Screw  [SCREWTERMINAL-3.5MM-3_LOCK.007S]  200.41,99.97 270 top
JP70  Load  [1X05_NO_SILK]  191.52,78.23 90 top
JP71  Screw Terminals  [SCREWTERMINAL-3.5MM-5]  200.41,89.15 270 top
JP72  JUMPER-PAD-3-2OF3_NC_BY_PASTE  [PAD-JUMPER-3-2OF3_NC_BY_PASTE_YES_SILK_FULL_BOX]  234.63,68.58 0 top
JP73  USBSMD  [USB-MINIB]  61.98,147.19 180 top
JP74  AVR_PRG  [2X3]  39.12,157.99 0 top
JP75  Temp  [1X03_NO_SILK]  12.45,151.64 270 bottom
JP76  Fixed Gain 32  [1X02]  20.07,120.84 90 bottom
JP77  FTDI_BASIC  [FTDI_BASIC]  65.79,124.97 90 top
JP78  Screw  [SCREWTERMINAL-3.5MM-3_LOCK.007S]  21.34,151.79 270 top
JP79  Load  [1X05_NO_SILK]  12.45,130.05 90 top
JP80  Screw Terminals  [SCREWTERMINAL-3.5MM-5]  21.34,140.97 270 top
JP81  JUMPER-PAD-3-2OF3_NC_BY_PASTE  [PAD-JUMPER-3-2OF3_NC_BY_PASTE_YES_SILK_FULL_BOX]  55.56,120.4 0 top
JP82  USBSMD  [USB-MINIB]  121.67,147.19 180 top
JP83  AVR_PRG  [2X3]  98.81,157.99 0 top
JP84  Temp  [1X03_NO_SILK]  72.14,151.64 270 bottom
JP85  Fixed Gain 32  [1X02]  79.76,120.84 90 bottom
JP86  FTDI_BASIC  [FTDI_BASIC]  125.48,124.97 90 top
JP87  Screw  [SCREWTERMINAL-3.5MM-3_LOCK.007S]  81.03,151.79 270 top
JP88  Load  [1X05_NO_SILK]  72.14,130.05 90 top
JP89  Screw Terminals  [SCREWTERMINAL-3.5MM-5]  81.03,140.97 270 top
JP90  JUMPER-PAD-3-2OF3_NC_BY_PASTE  [PAD-JUMPER-3-2OF3_NC_BY_PASTE_YES_SILK_FULL_BOX]  115.25,120.4 0 top
JP91  USBSMD  [USB-MINIB]  181.36,147.19 180 top
JP92  AVR_PRG  [2X3]  158.5,157.99 0 top
JP93  Temp  [1X03_NO_SILK]  131.83,151.64 270 bottom
JP94  Fixed Gain 32  [1X02]  139.45,120.84 90 bottom
JP95  FTDI_BASIC  [FTDI_BASIC]  185.17,124.97 90 top
JP96  Screw  [SCREWTERMINAL-3.5MM-3_LOCK.007S]  140.72,151.79 270 top
JP97  Load  [1X05_NO_SILK]  131.83,130.05 90 top
JP98  Screw Terminals  [SCREWTERMINAL-3.5MM-5]  140.72,140.97 270 top
JP99  JUMPER-PAD-3-2OF3_NC_BY_PASTE  [PAD-JUMPER-3-2OF3_NC_BY_PASTE_YES_SILK_FULL_BOX]  174.94,120.4 0 top
JP100  USBSMD  [USB-MINIB]  241.05,147.19 180 top
JP101  AVR_PRG  [2X3]  218.19,157.99 0 top
JP102  Temp  [1X03_NO_SILK]  191.52,151.64 270 bottom
JP103  Fixed Gain 32  [1X02]  199.14,120.84 90 bottom
JP104  FTDI_BASIC  [FTDI_BASIC]  244.86,124.97 90 top
JP105  Screw  [SCREWTERMINAL-3.5MM-3_LOCK.007S]  200.41,151.79 270 top
JP106  Load  [1X05_NO_SILK]  191.52,130.05 90 top
JP107  Screw Terminals  [SCREWTERMINAL-3.5MM-5]  200.41,140.97 270 top
JP108  JUMPER-PAD-3-2OF3_NC_BY_PASTE  [PAD-JUMPER-3-2OF3_NC_BY_PASTE_YES_SILK_FULL_BOX]  234.63,120.4 0 top
L1  3.3uH  [0805]  28.96,34.67 270 top
L2  3.3uH  [0805]  88.65,34.67 270 top
L3  3.3uH  [0805]  148.34,34.67 270 top
L4  3.3uH  [0805]  208.03,34.67 270 top
L5  3.3uH  [0805]  28.96,86.49 270 top
L6  3.3uH  [0805]  88.65,86.49 270 top
L7  3.3uH  [0805]  148.34,86.49 270 top
L8  3.3uH  [0805]  208.03,86.49 270 top
L9  3.3uH  [0805]  28.96,138.3 270 top
L10  3.3uH  [0805]  88.65,138.3 270 top
L11  3.3uH  [0805]  148.34,138.3 270 top
L12  3.3uH  [0805]  208.03,138.3 270 top
LOGO1  SFE_LOGO_NAME_FLAME.1_INCH  [SFE_LOGO_NAME_FLAME_.1]  19.11,52.01 0 top
LOGO2  OSHW-LOGOS  [OSHW-LOGO-S]  42.16,30.86 0 bottom
LOGO3  SFE_LOGO_FLAME.1_INCH  [SFE_LOGO_FLAME_.1]  18.67,12.38 0 top
LOGO4  SFE_LOGO_NAME_FLAME.1_INCH  [SFE_LOGO_NAME_FLAME_.1]  47.75,37.15 0 bottom
LOGO5  OSHW-LOGOS  [OSHW-LOGO-S]  23.5,13.97 0 top
LOGO6  OSHW-LOGOS  [OSHW-LOGO-S]  101.85,30.86 0 bottom
LOGO7  SFE_LOGO_NAME_FLAME.1_INCH  [SFE_LOGO_NAME_FLAME_.1]  107.44,37.15 0 bottom
LOGO8  SFE_LOGO_FLAME.1_INCH  [SFE_LOGO_FLAME_.1]  78.36,12.38 0 top
LOGO9  SFE_LOGO_NAME_FLAME.1_INCH  [SFE_LOGO_NAME_FLAME_.1]  78.8,52.01 0 top
LOGO10  OSHW-LOGOS  [OSHW-LOGO-S]  83.19,13.97 0 top
LOGO11  OSHW-LOGOS  [OSHW-LOGO-S]  161.54,30.86 0 bottom
LOGO12  SFE_LOGO_NAME_FLAME.1_INCH  [SFE_LOGO_NAME_FLAME_.1]  167.13,37.15 0 bottom
LOGO13  SFE_LOGO_FLAME.1_INCH  [SFE_LOGO_FLAME_.1]  138.05,12.38 0 top
LOGO14  SFE_LOGO_NAME_FLAME.1_INCH  [SFE_LOGO_NAME_FLAME_.1]  138.49,52.01 0 top
LOGO15  OSHW-LOGOS  [OSHW-LOGO-S]  142.88,13.97 0 top
LOGO16  OSHW-LOGOS  [OSHW-LOGO-S]  221.23,30.86 0 bottom
LOGO17  SFE_LOGO_NAME_FLAME.1_INCH  [SFE_LOGO_NAME_FLAME_.1]  226.82,37.15 0 bottom
LOGO18  SFE_LOGO_FLAME.1_INCH  [SFE_LOGO_FLAME_.1]  197.74,12.38 0 top
LOGO19  SFE_LOGO_NAME_FLAME.1_INCH  [SFE_LOGO_NAME_FLAME_.1]  198.18,52.01 0 top
LOGO20  OSHW-LOGOS  [OSHW-LOGO-S]  202.56,13.97 0 top
LOGO21  OSHW-LOGOS  [OSHW-LOGO-S]  42.16,82.68 0 bottom
LOGO22  SFE_LOGO_NAME_FLAME.1_INCH  [SFE_LOGO_NAME_FLAME_.1]  47.75,88.96 0 bottom
LOGO23  SFE_LOGO_FLAME.1_INCH  [SFE_LOGO_FLAME_.1]  18.67,64.2 0 top
LOGO24  SFE_LOGO_NAME_FLAME.1_INCH  [SFE_LOGO_NAME_FLAME_.1]  19.11,103.82 0 top
LOGO25  OSHW-LOGOS  [OSHW-LOGO-S]  23.5,65.79 0 top
LOGO26  OSHW-LOGOS  [OSHW-LOGO-S]  101.85,82.68 0 bottom
LOGO27  SFE_LOGO_NAME_FLAME.1_INCH  [SFE_LOGO_NAME_FLAME_.1]  107.44,88.96 0 bottom
LOGO28  SFE_LOGO_FLAME.1_INCH  [SFE_LOGO_FLAME_.1]  78.36,64.2 0 top
LOGO29  SFE_LOGO_NAME_FLAME.1_INCH  [SFE_LOGO_NAME_FLAME_.1]  78.8,103.82 0 top
LOGO30  OSHW-LOGOS  [OSHW-LOGO-S]  83.19,65.79 0 top
LOGO31  OSHW-LOGOS  [OSHW-LOGO-S]  161.54,82.68 0 bottom
LOGO32  SFE_LOGO_NAME_FLAME.1_INCH  [SFE_LOGO_NAME_FLAME_.1]  167.13,88.96 0 bottom
LOGO33  SFE_LOGO_FLAME.1_INCH  [SFE_LOGO_FLAME_.1]  138.05,64.2 0 top
LOGO34  SFE_LOGO_NAME_FLAME.1_INCH  [SFE_LOGO_NAME_FLAME_.1]  138.49,103.82 0 top
LOGO35  OSHW-LOGOS  [OSHW-LOGO-S]  142.88,65.79 0 top
LOGO36  OSHW-LOGOS  [OSHW-LOGO-S]  221.23,82.68 0 bottom
LOGO37  SFE_LOGO_NAME_FLAME.1_INCH  [SFE_LOGO_NAME_FLAME_.1]  226.82,88.96 0 bottom
LOGO38  SFE_LOGO_FLAME.1_INCH  [SFE_LOGO_FLAME_.1]  197.74,64.2 0 top
LOGO39  SFE_LOGO_NAME_FLAME.1_INCH  [SFE_LOGO_NAME_FLAME_.1]  198.18,103.82 0 top
LOGO40  OSHW-LOGOS  [OSHW-LOGO-S]  202.56,65.79 0 top
LOGO41  OSHW-LOGOS  [OSHW-LOGO-S]  42.16,134.49 0 bottom
LOGO42  SFE_LOGO_NAME_FLAME.1_INCH  [SFE_LOGO_NAME_FLAME_.1]  47.75,140.78 0 bottom
LOGO43  SFE_LOGO_FLAME.1_INCH  [SFE_LOGO_FLAME_.1]  18.67,116.01 0 top
LOGO44  SFE_LOGO_NAME_FLAME.1_INCH  [SFE_LOGO_NAME_FLAME_.1]  19.11,155.64 0 top
LOGO45  OSHW-LOGOS  [OSHW-LOGO-S]  23.5,117.6 0 top
LOGO46  OSHW-LOGOS  [OSHW-LOGO-S]  101.85,134.49 0 bottom
LOGO47  SFE_LOGO_NAME_FLAME.1_INCH  [SFE_LOGO_NAME_FLAME_.1]  107.44,140.78 0 bottom
LOGO48  SFE_LOGO_FLAME.1_INCH  [SFE_LOGO_FLAME_.1]  78.36,116.01 0 top
LOGO49  SFE_LOGO_NAME_FLAME.1_INCH  [SFE_LOGO_NAME_FLAME_.1]  78.8,155.64 0 top
LOGO50  OSHW-LOGOS  [OSHW-LOGO-S]  83.19,117.6 0 top
LOGO51  OSHW-LOGOS  [OSHW-LOGO-S]  161.54,134.49 0 bottom
LOGO52  SFE_LOGO_NAME_FLAME.1_INCH  [SFE_LOGO_NAME_FLAME_.1]  167.13,140.78 0 bottom
LOGO53  SFE_LOGO_FLAME.1_INCH  [SFE_LOGO_FLAME_.1]  138.05,116.01 0 top
LOGO54  SFE_LOGO_NAME_FLAME.1_INCH  [SFE_LOGO_NAME_FLAME_.1]  138.49,155.64 0 top
LOGO55  OSHW-LOGOS  [OSHW-LOGO-S]  142.88,117.6 0 top
LOGO56  OSHW-LOGOS  [OSHW-LOGO-S]  221.23,134.49 0 bottom
LOGO57  SFE_LOGO_NAME_FLAME.1_INCH  [SFE_LOGO_NAME_FLAME_.1]  226.82,140.78 0 bottom
LOGO58  SFE_LOGO_FLAME.1_INCH  [SFE_LOGO_FLAME_.1]  197.74,116.01 0 top
LOGO59  SFE_LOGO_NAME_FLAME.1_INCH  [SFE_LOGO_NAME_FLAME_.1]  198.18,155.64 0 top
LOGO60  OSHW-LOGOS  [OSHW-LOGO-S]  202.56,117.6 0 top
Q1  200mA/50V  [SOT23-3]  59.12,21.65 270 top
Q2  200mA/50V  [SOT23-3]  45.78,21.65 270 top
Q3  MMBT4403  [SOT23-3]  30.86,31.18 90 top
Q4  MOSFET-NCHANNEL2N7002PW  [SOT323]  46.42,35.62 180 top
Q5  200mA/50V  [SOT23-3]  118.81,21.65 270 top
Q6  200mA/50V  [SOT23-3]  105.47,21.65 270 top
Q7  MMBT4403  [SOT23-3]  90.55,31.18 90 top
Q8  MOSFET-NCHANNEL2N7002PW  [SOT323]  106.11,35.62 180 top
Q9  200mA/50V  [SOT23-3]  178.5,21.65 270 top
Q10  200mA/50V  [SOT23-3]  165.16,21.65 270 top
Q11  MMBT4403  [SOT23-3]  150.24,31.18 90 top
Q12  MOSFET-NCHANNEL2N7002PW  [SOT323]  165.8,35.62 180 top
Q13  200mA/50V  [SOT23-3]  238.19,21.65 270 top
Q14  200mA/50V  [SOT23-3]  224.85,21.65 270 top
Q15  MMBT4403  [SOT23-3]  209.93,31.18 90 top
Q16  MOSFET-NCHANNEL2N7002PW  [SOT323]  225.49,35.62 180 top
Q17  200mA/50V  [SOT23-3]  59.12,73.47 270 top
Q18  200mA/50V  [SOT23-3]  45.78,73.47 270 top
Q19  MMBT4403  [SOT23-3]  30.86,82.99 90 top
Q20  MOSFET-NCHANNEL2N7002PW  [SOT323]  46.42,87.44 180 top
Q21  200mA/50V  [SOT23-3]  118.81,73.47 270 top
Q22  200mA/50V  [SOT23-3]  105.47,73.47 270 top
Q23  MMBT4403  [SOT23-3]  90.55,82.99 90 top
Q24  MOSFET-NCHANNEL2N7002PW  [SOT323]  106.11,87.44 180 top
Q25  200mA/50V  [SOT23-3]  178.5,73.47 270 top
Q26  200mA/50V  [SOT23-3]  165.16,73.47 270 top
Q27  MMBT4403  [SOT23-3]  150.24,82.99 90 top
Q28  MOSFET-NCHANNEL2N7002PW  [SOT323]  165.8,87.44 180 top
Q29  200mA/50V  [SOT23-3]  238.19,73.47 270 top
Q30  200mA/50V  [SOT23-3]  224.85,73.47 270 top
Q31  MMBT4403  [SOT23-3]  209.93,82.99 90 top
Q32  MOSFET-NCHANNEL2N7002PW  [SOT323]  225.49,87.44 180 top
Q33  200mA/50V  [SOT23-3]  59.12,125.29 270 top
Q34  200mA/50V  [SOT23-3]  45.78,125.29 270 top
Q35  MMBT4403  [SOT23-3]  30.86,134.81 90 top
Q36  MOSFET-NCHANNEL2N7002PW  [SOT323]  46.42,139.26 180 top
Q37  200mA/50V  [SOT23-3]  118.81,125.29 270 top
Q38  200mA/50V  [SOT23-3]  105.47,125.29 270 top
Q39  MMBT4403  [SOT23-3]  90.55,134.81 90 top
Q40  MOSFET-NCHANNEL2N7002PW  [SOT323]  106.11,139.26 180 top
Q41  200mA/50V  [SOT23-3]  178.5,125.29 270 top
Q42  200mA/50V  [SOT23-3]  165.16,125.29 270 top
Q43  MMBT4403  [SOT23-3]  150.24,134.81 90 top
Q44  MOSFET-NCHANNEL2N7002PW  [SOT323]  165.8,139.26 180 top
Q45  200mA/50V  [SOT23-3]  238.19,125.29 270 top
Q46  200mA/50V  [SOT23-3]  224.85,125.29 270 top
Q47  MMBT4403  [SOT23-3]  209.93,134.81 90 top
Q48  MOSFET-NCHANNEL2N7002PW  [SOT323]  225.49,139.26 180 top
R1  27  [0603]  56.01,45.15 180 top
R2  10K  [0603-RES]  50.23,53.09 180 top
R3  100  [0603-RES]  30.86,22.29 0 top
R4  100  [0603-RES]  30.86,19.75 0 top
R5  1K  [0603-RES]  53.09,35.31 0 top
R6  27  [0603]  56.01,41.02 180 top
R7  10K  [0603-RES]  43.56,28.96 0 top
R8  4.7K  [0603-RES]  55.94,21.65 90 top
R9  4.7K  [0603-RES]  48.96,21.65 90 top
R10  10K  [0603-RES]  44.2,35.62 270 top
R11  1K  [0603-RES]  59.75,27.37 90 top
R12  1K  [0603-RES]  57.85,27.37 270 top
R13  1K  [0603-RES]  53.09,30.86 0 top
R14  4.7K  [0603-RES]  41.02,42.29 0 top
R15  1K  [0603-RES]  53.4,26.1 0 top
R16  20k  [0603-RES]  30.86,28.32 0 top
R17  8.2K  [0603-RES]  30.86,26.1 180 top
R18  10K  [0603-RES]  45.47,32.13 270 top
R19  10K  [0603-RES]  109.92,53.09 180 top
R20  1K  [0603-RES]  112.78,35.31 0 top
R21  1K  [0603-RES]  112.78,30.86 0 top
R22  1K  [0603-RES]  113.09,26.1 0 top
R23  100  [0603-RES]  90.55,22.29 0 top
R24  100  [0603-RES]  90.55,19.75 0 top
R25  10K  [0603-RES]  103.25,28.96 0 top
R26  4.7K  [0603-RES]  115.63,21.65 90 top
R27  4.7K  [0603-RES]  108.65,21.65 90 top
R28  27  [0603]  115.7,45.15 180 top
R29  27  [0603]  115.7,41.02 180 top
R30  1K  [0603-RES]  119.44,27.37 90 top
R31  1K  [0603-RES]  117.54,27.37 270 top
R32  4.7K  [0603-RES]  100.71,42.29 0 top
R33  20k  [0603-RES]  90.55,28.32 0 top
R34  8.2K  [0603-RES]  90.55,26.1 180 top
R35  10K  [0603-RES]  103.89,35.62 270 top
R36  10K  [0603-RES]  105.16,32.13 270 top
R37  10K  [0603-RES]  169.61,53.09 180 top
R38  1K  [0603-RES]  172.47,35.31 0 top
R39  1K  [0603-RES]  172.47,30.86 0 top
R40  1K  [0603-RES]  172.78,26.1 0 top
R41  100  [0603-RES]  150.24,22.29 0 top
R42  100  [0603-RES]  150.24,19.75 0 top
R43  10K  [0603-RES]  162.94,28.96 0 top
R44  4.7K  [0603-RES]  175.32,21.65 90 top
R45  4.7K  [0603-RES]  168.34,21.65 90 top
R46  27  [0603]  175.39,45.15 180 top
R47  27  [0603]  175.39,41.02 180 top
R48  1K  [0603-RES]  179.13,27.37 90 top
R49  1K  [0603-RES]  177.23,27.37 270 top
R50  4.7K  [0603-RES]  160.4,42.29 0 top
R51  20k  [0603-RES]  150.24,28.32 0 top
R52  8.2K  [0603-RES]  150.24,26.1 180 top
R53  10K  [0603-RES]  163.58,35.62 270 top
R54  10K  [0603-RES]  164.85,32.13 270 top
R55  10K  [0603-RES]  229.3,53.09 180 top
R56  1K  [0603-RES]  232.16,35.31 0 top
R57  1K  [0603-RES]  232.16,30.86 0 top
R58  1K  [0603-RES]  232.47,26.1 0 top
R59  100  [0603-RES]  209.93,22.29 0 top
R60  100  [0603-RES]  209.93,19.75 0 top
R61  10K  [0603-RES]  222.63,28.96 0 top
R62  4.7K  [0603-RES]  235.01,21.65 90 top
R63  4.7K  [0603-RES]  228.03,21.65 90 top
R64  27  [0603]  235.08,45.15 180 top
R65  27  [0603]  235.08,41.02 180 top
R66  1K  [0603-RES]  238.82,27.37 90 top
R67  1K  [0603-RES]  236.92,27.37 270 top
R68  4.7K  [0603-RES]  220.09,42.29 0 top
R69  20k  [0603-RES]  209.93,28.32 0 top
R70  8.2K  [0603-RES]  209.93,26.1 180 top
R71  10K  [0603-RES]  223.27,35.62 270 top
R72  10K  [0603-RES]  224.54,32.13 270 top
R73  10K  [0603-RES]  50.23,104.9 180 top
R74  1K  [0603-RES]  53.09,87.12 0 top
R75  1K  [0603-RES]  53.09,82.68 0 top
R76  1K  [0603-RES]  53.4,77.91 0 top
R77  100  [0603-RES]  30.86,74.1 0 top
R78  100  [0603-RES]  30.86,71.56 0 top
R79  10K  [0603-RES]  43.56,80.77 0 top
R80  4.7K  [0603-RES]  55.94,73.47 90 top
R81  4.7K  [0603-RES]  48.96,73.47 90 top
R82  27  [0603]  56.01,96.96 180 top
R83  27  [0603]  56.01,92.84 180 top
R84  1K  [0603-RES]  59.75,79.18 90 top
R85  1K  [0603-RES]  57.85,79.18 270 top
R86  4.7K  [0603-RES]  41.02,94.11 0 top
R87  20k  [0603-RES]  30.86,80.14 0 top
R88  8.2K  [0603-RES]  30.86,77.91 180 top
R89  10K  [0603-RES]  44.2,87.44 270 top
R90  10K  [0603-RES]  45.47,83.95 270 top
R91  10K  [0603-RES]  109.92,104.9 180 top
R92  1K  [0603-RES]  112.78,87.12 0 top
R93  1K  [0603-RES]  112.78,82.68 0 top
R94  1K  [0603-RES]  113.09,77.91 0 top
R95  100  [0603-RES]  90.55,74.1 0 top
R96  100  [0603-RES]  90.55,71.56 0 top
R97  10K  [0603-RES]  103.25,80.77 0 top
R98  4.7K  [0603-RES]  115.63,73.47 90 top
R99  4.7K  [0603-RES]  108.65,73.47 90 top
R100  27  [0603]  115.7,96.96 180 top
R101  27  [0603]  115.7,92.84 180 top
R102  1K  [0603-RES]  119.44,79.18 90 top
R103  1K  [0603-RES]  117.54,79.18 270 top
R104  4.7K  [0603-RES]  100.71,94.11 0 top
R105  20k  [0603-RES]  90.55,80.14 0 top
R106  8.2K  [0603-RES]  90.55,77.91 180 top
R107  10K  [0603-RES]  103.89,87.44 270 top
R108  10K  [0603-RES]  105.16,83.95 270 top
R109  10K  [0603-RES]  169.61,104.9 180 top
R110  1K  [0603-RES]  172.47,87.12 0 top
R111  1K  [0603-RES]  172.47,82.68 0 top
R112  1K  [0603-RES]  172.78,77.91 0 top
R113  100  [0603-RES]  150.24,74.1 0 top
R114  100  [0603-RES]  150.24,71.56 0 top
R115  10K  [0603-RES]  162.94,80.77 0 top
R116  4.7K  [0603-RES]  175.32,73.47 90 top
R117  4.7K  [0603-RES]  168.34,73.47 90 top
R118  27  [0603]  175.39,96.96 180 top
R119  27  [0603]  175.39,92.84 180 top
R120  1K  [0603-RES]  179.13,79.18 90 top
R121  1K  [0603-RES]  177.23,79.18 270 top
R122  4.7K  [0603-RES]  160.4,94.11 0 top
R123  20k  [0603-RES]  150.24,80.14 0 top
R124  8.2K  [0603-RES]  150.24,77.91 180 top
R125  10K  [0603-RES]  163.58,87.44 270 top
R126  10K  [0603-RES]  164.85,83.95 270 top
R127  10K  [0603-RES]  229.3,104.9 180 top
R128  1K  [0603-RES]  232.16,87.12 0 top
R129  1K  [0603-RES]  232.16,82.68 0 top
R130  1K  [0603-RES]  232.47,77.91 0 top
R131  100  [0603-RES]  209.93,74.1 0 top
R132  100  [0603-RES]  209.93,71.56 0 top
R133  10K  [0603-RES]  222.63,80.77 0 top
R134  4.7K  [0603-RES]  235.01,73.47 90 top
R135  4.7K  [0603-RES]  228.03,73.47 90 top
R136  27  [0603]  235.08,96.96 180 top
R137  27  [0603]  235.08,92.84 180 top
R138  1K  [0603-RES]  238.82,79.18 90 top
R139  1K  [0603-RES]  236.92,79.18 270 top
R140  4.7K  [0603-RES]  220.09,94.11 0 top
R141  20k  [0603-RES]  209.93,80.14 0 top
R142  8.2K  [0603-RES]  209.93,77.91 180 top
R143  10K  [0603-RES]  223.27,87.44 270 top
R144  10K  [0603-RES]  224.54,83.95 270 top
R145  10K  [0603-RES]  50.23,156.72 180 top
R146  1K  [0603-RES]  53.09,138.94 0 top
R147  1K  [0603-RES]  53.09,134.49 0 top
R148  1K  [0603-RES]  53.4,129.73 0 top
R149  100  [0603-RES]  30.86,125.92 0 top
R150  100  [0603-RES]  30.86,123.38 0 top
R151  10K  [0603-RES]  43.56,132.59 0 top
R152  4.7K  [0603-RES]  55.94,125.29 90 top
R153  4.7K  [0603-RES]  48.96,125.29 90 top
R154  27  [0603]  56.01,148.78 180 top
R155  27  [0603]  56.01,144.65 180 top
R156  1K  [0603-RES]  59.75,131 90 top
R157  1K  [0603-RES]  57.85,131 270 top
R158  4.7K  [0603-RES]  41.02,145.92 0 top
R159  20k  [0603-RES]  30.86,131.95 0 top
R160  8.2K  [0603-RES]  30.86,129.73 180 top
R161  10K  [0603-RES]  44.2,139.26 270 top
R162  10K  [0603-RES]  45.47,135.76 270 top
R163  10K  [0603-RES]  109.92,156.72 180 top
R164  1K  [0603-RES]  112.78,138.94 0 top
R165  1K  [0603-RES]  112.78,134.49 0 top
R166  1K  [0603-RES]  113.09,129.73 0 top
R167  100  [0603-RES]  90.55,125.92 0 top
R168  100  [0603-RES]  90.55,123.38 0 top
R169  10K  [0603-RES]  103.25,132.59 0 top
R170  4.7K  [0603-RES]  115.63,125.29 90 top
R171  4.7K  [0603-RES]  108.65,125.29 90 top
R172  27  [0603]  115.7,148.78 180 top
R173  27  [0603]  115.7,144.65 180 top
R174  1K  [0603-RES]  119.44,131 90 top
R175  1K  [0603-RES]  117.54,131 270 top
R176  4.7K  [0603-RES]  100.71,145.92 0 top
R177  20k  [0603-RES]  90.55,131.95 0 top
R178  8.2K  [0603-RES]  90.55,129.73 180 top
R179  10K  [0603-RES]  103.89,139.26 270 top
R180  10K  [0603-RES]  105.16,135.76 270 top
R181  10K  [0603-RES]  169.61,156.72 180 top
R182  1K  [0603-RES]  172.47,138.94 0 top
R183  1K  [0603-RES]  172.47,134.49 0 top
R184  1K  [0603-RES]  172.78,129.73 0 top
R185  100  [0603-RES]  150.24,125.92 0 top
R186  100  [0603-RES]  150.24,123.38 0 top
R187  10K  [0603-RES]  162.94,132.59 0 top
R188  4.7K  [0603-RES]  175.32,125.29 90 top
R189  4.7K  [0603-RES]  168.34,125.29 90 top
R190  27  [0603]  175.39,148.78 180 top
R191  27  [0603]  175.39,144.65 180 top
R192  1K  [0603-RES]  179.13,131 90 top
R193  1K  [0603-RES]  177.23,131 270 top
R194  4.7K  [0603-RES]  160.4,145.92 0 top
R195  20k  [0603-RES]  150.24,131.95 0 top
R196  8.2K  [0603-RES]  150.24,129.73 180 top
R197  10K  [0603-RES]  163.58,139.26 270 top
R198  10K  [0603-RES]  164.85,135.76 270 top
R199  10K  [0603-RES]  229.3,156.72 180 top
R200  1K  [0603-RES]  232.16,138.94 0 top
R201  1K  [0603-RES]  232.16,134.49 0 top
R202  1K  [0603-RES]  232.47,129.73 0 top
R203  100  [0603-RES]  209.93,125.92 0 top
R204  100  [0603-RES]  209.93,123.38 0 top
R205  10K  [0603-RES]  222.63,132.59 0 top
R206  4.7K  [0603-RES]  235.01,125.29 90 top
R207  4.7K  [0603-RES]  228.03,125.29 90 top
R208  27  [0603]  235.08,148.78 180 top
R209  27  [0603]  235.08,144.65 180 top
R210  1K  [0603-RES]  238.82,131 90 top
R211  1K  [0603-RES]  236.92,131 270 top
R212  4.7K  [0603-RES]  220.09,145.92 0 top
R213  20k  [0603-RES]  209.93,131.95 0 top
R214  8.2K  [0603-RES]  209.93,129.73 180 top
R215  10K  [0603-RES]  223.27,139.26 270 top
R216  10K  [0603-RES]  224.54,135.76 270 top
S1  Reset  [TACTILE-SWITCH-SMD]  116.27,54.36 0 top
S2  Reset  [TACTILE-SWITCH-SMD]  56.58,54.36 0 top
S3  Reset  [TACTILE-SWITCH-SMD]  175.96,54.36 0 top
S4  Reset  [TACTILE-SWITCH-SMD]  235.65,54.36 0 top
S5  Reset  [TACTILE-SWITCH-SMD]  56.58,106.17 0 top
S6  Reset  [TACTILE-SWITCH-SMD]  116.27,106.17 0 top
S7  Reset  [TACTILE-SWITCH-SMD]  175.96,106.17 0 top
S8  Reset  [TACTILE-SWITCH-SMD]  235.65,106.17 0 top
S9  Reset  [TACTILE-SWITCH-SMD]  56.58,157.99 0 top
S10  Reset  [TACTILE-SWITCH-SMD]  116.27,157.99 0 top
S11  Reset  [TACTILE-SWITCH-SMD]  175.96,157.99 0 top
S12  Reset  [TACTILE-SWITCH-SMD]  235.65,157.99 0 top
SJ1  JUMPER-PAD-2-NC_BY_PASTE  [PAD-JUMPER-2-NC_BY_PASTE_YES_SILK]  103.25,27.05 90 top
SJ2  JUMPER-PAD-2-NC_BY_PASTE  [PAD-JUMPER-2-NC_BY_PASTE_YES_SILK]  43.56,27.05 90 top
SJ3  JUMPER-PAD-2-NC_BY_PASTE  [PAD-JUMPER-2-NC_BY_PASTE_YES_SILK]  162.94,27.05 90 top
SJ4  JUMPER-PAD-2-NC_BY_PASTE  [PAD-JUMPER-2-NC_BY_PASTE_YES_SILK]  222.63,27.05 90 top
SJ5  JUMPER-PAD-2-NC_BY_PASTE  [PAD-JUMPER-2-NC_BY_PASTE_YES_SILK]  43.56,78.87 90 top
SJ6  JUMPER-PAD-2-NC_BY_PASTE  [PAD-JUMPER-2-NC_BY_PASTE_YES_SILK]  103.25,78.87 90 top
SJ7  JUMPER-PAD-2-NC_BY_PASTE  [PAD-JUMPER-2-NC_BY_PASTE_YES_SILK]  162.94,78.87 90 top
SJ8  JUMPER-PAD-2-NC_BY_PASTE  [PAD-JUMPER-2-NC_BY_PASTE_YES_SILK]  222.63,78.87 90 top
SJ9  JUMPER-PAD-2-NC_BY_PASTE  [PAD-JUMPER-2-NC_BY_PASTE_YES_SILK]  43.56,130.68 90 top
SJ10  JUMPER-PAD-2-NC_BY_PASTE  [PAD-JUMPER-2-NC_BY_PASTE_YES_SILK]  103.25,130.68 90 top
SJ11  JUMPER-PAD-2-NC_BY_PASTE  [PAD-JUMPER-2-NC_BY_PASTE_YES_SILK]  162.94,130.68 90 top
SJ12  JUMPER-PAD-2-NC_BY_PASTE  [PAD-JUMPER-2-NC_BY_PASTE_YES_SILK]  222.63,130.68 90 top
STANDOFF1  STAND-OFF  [STAND-OFF]  63.88,54.99 0 top
STANDOFF2  STAND-OFF  [STAND-OFF]  63.88,14.35 0 top
STANDOFF3  STAND-OFF  [STAND-OFF]  14.35,14.35 0 top
STANDOFF4  STAND-OFF  [STAND-OFF]  14.35,54.99 0 top
STANDOFF5  STAND-OFF  [STAND-OFF]  74.04,54.99 0 top
STANDOFF6  STAND-OFF  [STAND-OFF]  74.04,14.35 0 top
STANDOFF7  STAND-OFF  [STAND-OFF]  123.57,14.35 0 top
STANDOFF8  STAND-OFF  [STAND-OFF]  123.57,54.99 0 top
STANDOFF9  STAND-OFF  [STAND-OFF]  133.73,54.99 0 top
STANDOFF10  STAND-OFF  [STAND-OFF]  133.73,14.35 0 top
STANDOFF11  STAND-OFF  [STAND-OFF]  183.26,14.35 0 top
STANDOFF12  STAND-OFF  [STAND-OFF]  183.26,54.99 0 top
STANDOFF13  STAND-OFF  [STAND-OFF]  193.42,54.99 0 top
STANDOFF14  STAND-OFF  [STAND-OFF]  193.42,14.35 0 top
STANDOFF15  STAND-OFF  [STAND-OFF]  242.95,14.35 0 top
STANDOFF16  STAND-OFF  [STAND-OFF]  242.95,54.99 0 top
STANDOFF17  STAND-OFF  [STAND-OFF]  14.35,106.81 0 top
STANDOFF18  STAND-OFF  [STAND-OFF]  14.35,66.17 0 top
STANDOFF19  STAND-OFF  [STAND-OFF]  63.88,66.17 0 top
STANDOFF20  STAND-OFF  [STAND-OFF]  63.88,106.81 0 top
STANDOFF21  STAND-OFF  [STAND-OFF]  74.04,106.81 0 top
STANDOFF22  STAND-OFF  [STAND-OFF]  74.04,66.17 0 top
STANDOFF23  STAND-OFF  [STAND-OFF]  123.57,66.17 0 top
STANDOFF24  STAND-OFF  [STAND-OFF]  123.57,106.81 0 top
STANDOFF25  STAND-OFF  [STAND-OFF]  133.73,106.81 0 top
STANDOFF26  STAND-OFF  [STAND-OFF]  133.73,66.17 0 top
STANDOFF27  STAND-OFF  [STAND-OFF]  183.26,66.17 0 top
STANDOFF28  STAND-OFF  [STAND-OFF]  183.26,106.81 0 top
STANDOFF29  STAND-OFF  [STAND-OFF]  193.42,106.81 0 top
STANDOFF30  STAND-OFF  [STAND-OFF]  193.42,66.17 0 top
STANDOFF31  STAND-OFF  [STAND-OFF]  242.95,66.17 0 top
STANDOFF32  STAND-OFF  [STAND-OFF]  242.95,106.81 0 top
STANDOFF33  STAND-OFF  [STAND-OFF]  14.35,158.62 0 top
STANDOFF34  STAND-OFF  [STAND-OFF]  14.35,117.98 0 top
STANDOFF35  STAND-OFF  [STAND-OFF]  63.88,117.98 0 top
STANDOFF36  STAND-OFF  [STAND-OFF]  63.88,158.62 0 top
STANDOFF37  STAND-OFF  [STAND-OFF]  74.04,158.62 0 top
STANDOFF38  STAND-OFF  [STAND-OFF]  74.04,117.98 0 top
STANDOFF39  STAND-OFF  [STAND-OFF]  123.57,117.98 0 top
STANDOFF40  STAND-OFF  [STAND-OFF]  123.57,158.62 0 top
STANDOFF41  STAND-OFF  [STAND-OFF]  133.73,158.62 0 top
STANDOFF42  STAND-OFF  [STAND-OFF]  133.73,117.98 0 top
STANDOFF43  STAND-OFF  [STAND-OFF]  183.26,117.98 0 top
STANDOFF44  STAND-OFF  [STAND-OFF]  183.26,158.62 0 top
STANDOFF45  STAND-OFF  [STAND-OFF]  193.42,158.62 0 top
STANDOFF46  STAND-OFF  [STAND-OFF]  193.42,117.98 0 top
STANDOFF47  STAND-OFF  [STAND-OFF]  242.95,117.98 0 top
STANDOFF48  STAND-OFF  [STAND-OFF]  242.95,158.62 0 top
U1  HX711  [SO16]  36.58,25.78 270 top
U2  HX711  [SO16]  96.27,25.78 270 top
U3  TMP102  [SOT563]  52.77,21.02 90 top
U4  ATMEGA328P_TQFP  [TQFP32-08]  33.4,45.47 180 top
U5  TMP102  [SOT563]  112.46,21.02 90 top
U6  FT231XS  [SSOP20_L]  48.96,42.61 0 top
U7  FT231XS  [SSOP20_L]  108.65,42.61 0 top
U8  ATMEGA328P_TQFP  [TQFP32-08]  93.09,45.47 180 top
U9  HX711  [SO16]  155.96,25.78 270 top
U10  TMP102  [SOT563]  172.15,21.02 90 top
U11  FT231XS  [SSOP20_L]  168.34,42.61 0 top
U12  ATMEGA328P_TQFP  [TQFP32-08]  152.78,45.47 180 top
U13  HX711  [SO16]  215.65,25.78 270 top
U14  TMP102  [SOT563]  231.84,21.02 90 top
U15  FT231XS  [SSOP20_L]  228.03,42.61 0 top
U16  ATMEGA328P_TQFP  [TQFP32-08]  212.47,45.47 180 top
U17  HX711  [SO16]  36.58,77.6 270 top
U18  TMP102  [SOT563]  52.77,72.83 90 top
U19  FT231XS  [SSOP20_L]  48.96,94.42 0 top
U20  ATMEGA328P_TQFP  [TQFP32-08]  33.4,97.28 180 top
U21  HX711  [SO16]  96.27,77.6 270 top
U22  TMP102  [SOT563]  112.46,72.83 90 top
U23  FT231XS  [SSOP20_L]  108.65,94.42 0 top
U24  ATMEGA328P_TQFP  [TQFP32-08]  93.09,97.28 180 top
U25  HX711  [SO16]  155.96,77.6 270 top
U26  TMP102  [SOT563]  172.15,72.83 90 top
U27  FT231XS  [SSOP20_L]  168.34,94.42 0 top
U28  ATMEGA328P_TQFP  [TQFP32-08]  152.78,97.28 180 top
U29  HX711  [SO16]  215.65,77.6 270 top
U30  TMP102  [SOT563]  231.84,72.83 90 top
U31  FT231XS  [SSOP20_L]  228.03,94.42 0 top
U32  ATMEGA328P_TQFP  [TQFP32-08]  212.47,97.28 180 top
U33  HX711  [SO16]  36.58,129.41 270 top
U34  TMP102  [SOT563]  52.77,124.65 90 top
U35  FT231XS  [SSOP20_L]  48.96,146.24 0 top
U36  ATMEGA328P_TQFP  [TQFP32-08]  33.4,149.1 180 top
U37  HX711  [SO16]  96.27,129.41 270 top
U38  TMP102  [SOT563]  112.46,124.65 90 top
U39  FT231XS  [SSOP20_L]  108.65,146.24 0 top
U40  ATMEGA328P_TQFP  [TQFP32-08]  93.09,149.1 180 top
U41  HX711  [SO16]  155.96,129.41 270 top
U42  TMP102  [SOT563]  172.15,124.65 90 top
U43  FT231XS  [SSOP20_L]  168.34,146.24 0 top
U44  ATMEGA328P_TQFP  [TQFP32-08]  152.78,149.1 180 top
U45  HX711  [SO16]  215.65,129.41 270 top
U46  TMP102  [SOT563]  231.84,124.65 90 top
U47  FT231XS  [SSOP20_L]  228.03,146.24 0 top
U48  ATMEGA328P_TQFP  [TQFP32-08]  212.47,149.1 180 top
Y1  16MHZ  [RESONATOR-SMD]  100.2,48.26 90 top
Y2  16MHZ  [RESONATOR-SMD]  40.51,48.26 90 top
Y3  16MHZ  [RESONATOR-SMD]  159.89,48.26 90 top
Y4  16MHZ  [RESONATOR-SMD]  219.58,48.26 90 top
Y5  16MHZ  [RESONATOR-SMD]  40.51,100.08 90 top
Y6  16MHZ  [RESONATOR-SMD]  100.2,100.08 90 top
Y7  16MHZ  [RESONATOR-SMD]  159.89,100.08 90 top
Y8  16MHZ  [RESONATOR-SMD]  219.58,100.08 90 top
Y9  16MHZ  [RESONATOR-SMD]  40.51,151.89 90 top
Y10  16MHZ  [RESONATOR-SMD]  100.2,151.89 90 top
Y11  16MHZ  [RESONATOR-SMD]  159.89,151.89 90 top
Y12  16MHZ  [RESONATOR-SMD]  219.58,151.89 90 top